# EAGLE board board (EAGLE 9.6.2)
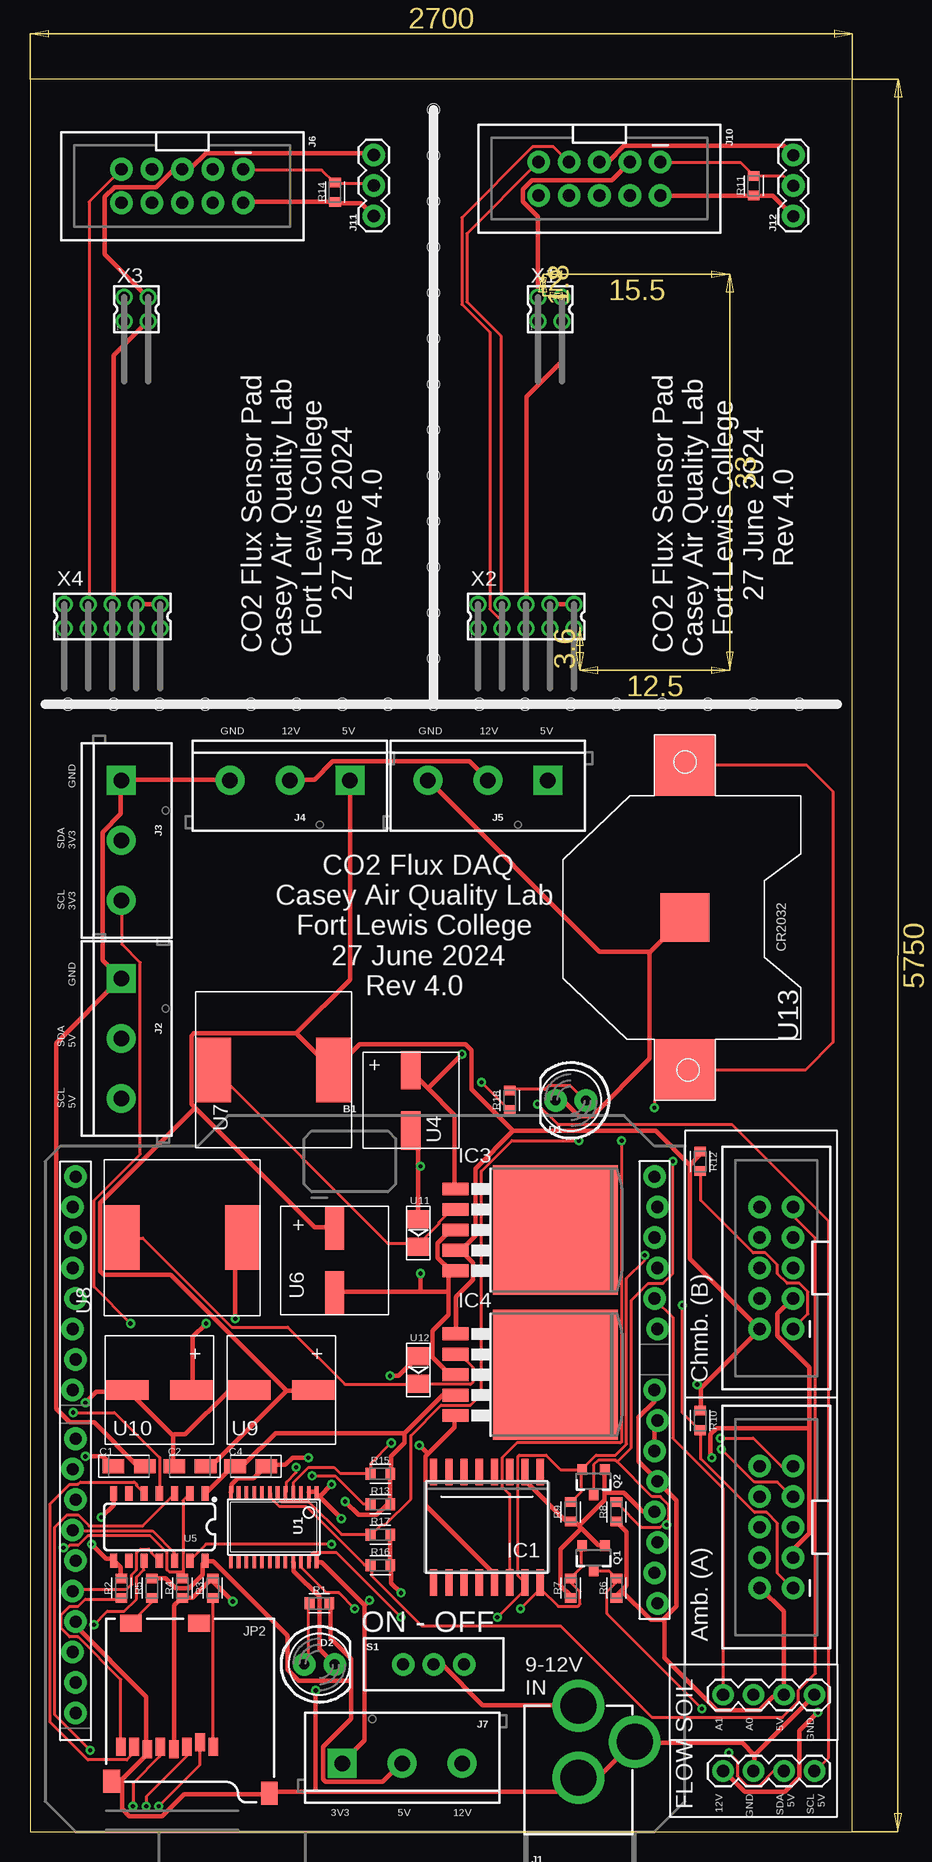
[diagram p0: board, top side]
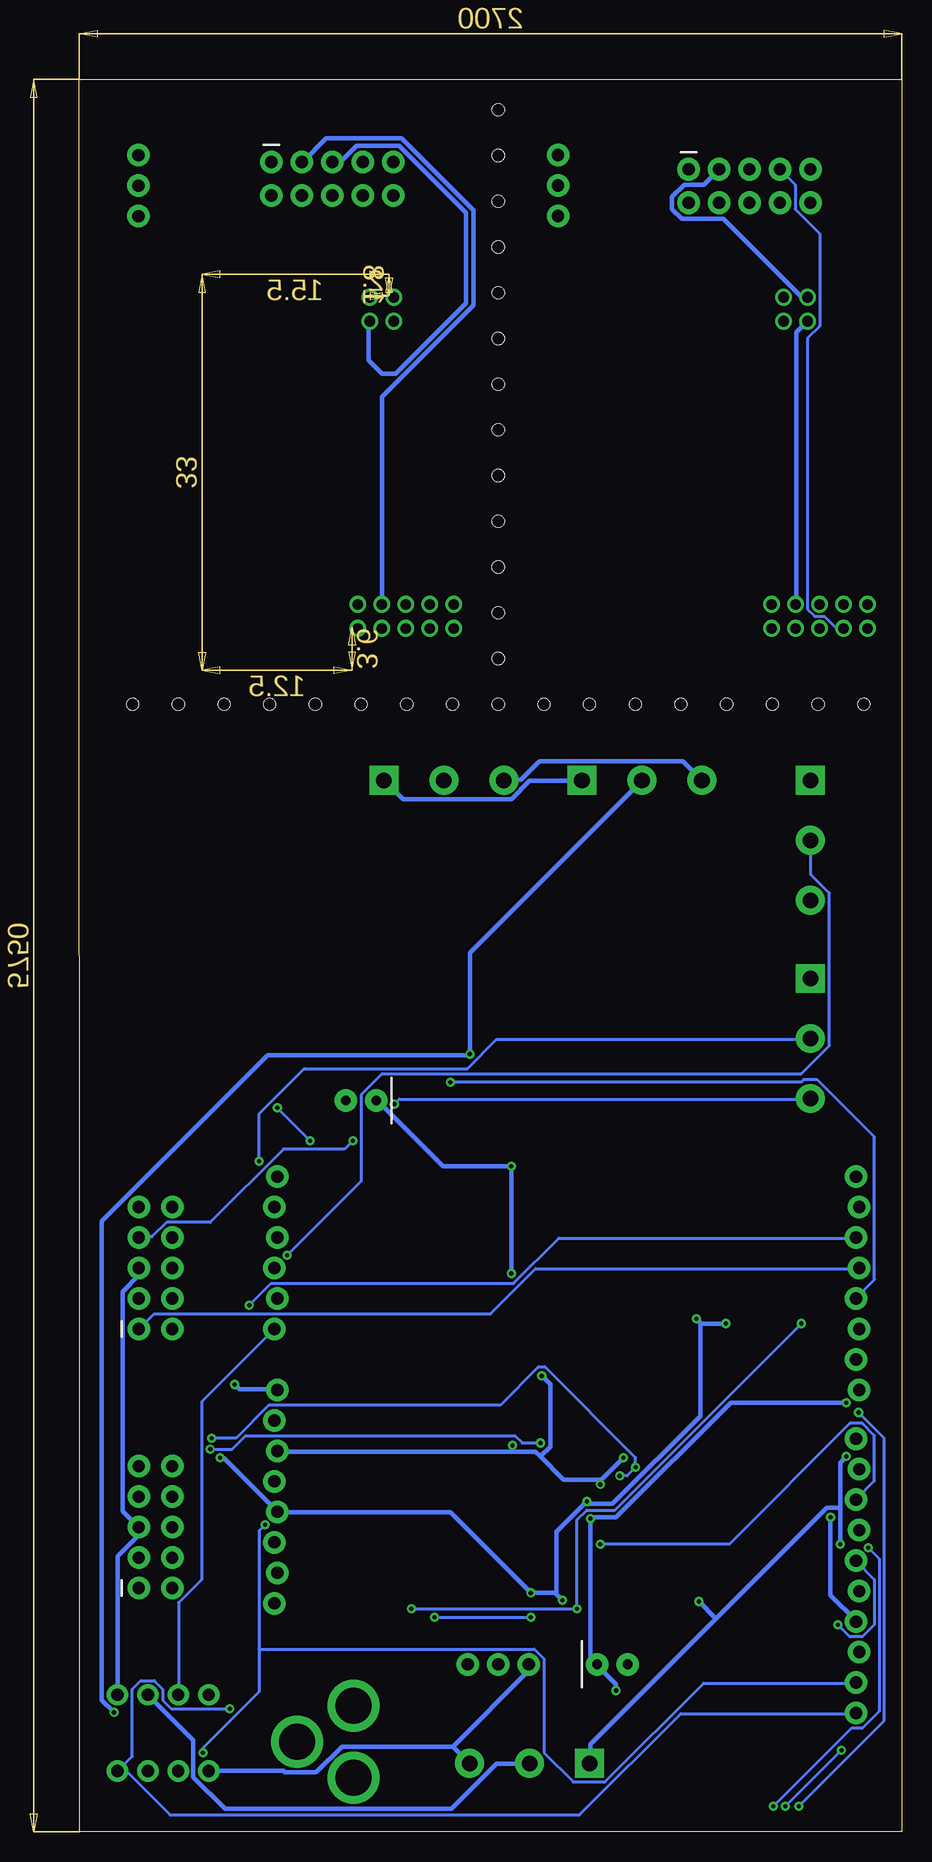
[diagram p1: board, bottom side, seen from below]

Size 68.58 x 146.05 mm. Coordinates in mm from the lower left corner, seen from the top.
Outline: 0,0 68.56,0 68.58,146.05 0,146.05 0,0
Copper layers (1*16): Top 0.035mm / dielectric 1.5mm / Bottom 0.035mm
Design rules "default": minimum track width 6mil, minimum drill 0.35mm, track to track 6mil, track to pad 6mil, pad to pad 6mil, via to via 6mil, smd to smd 6mil, copper to edge 40mil, drill to drill 6mil, minimum pad ring 10mil, minimum via ring 8mil, stop-mask expansion 4mil, vias tented up to drill 0mil, thermal gap 10mil
Net classes: 0 default: width 0.254 mm, clearance 0.152 mm; 1 power: width 0.381 mm, clearance 0.152 mm
Holes 1 mm at 3.17,93.98 6.98,93.98 10.79,93.98 14.61,93.98 18.41,93.98 22.22,93.98 26.04,93.98 29.84,93.98 33.66,93.98 37.47,93.98 41.28,93.98 45.09,93.98 48.9,93.98 52.71,93.98 56.52,93.98 60.33,93.98 64.14,93.98 33.66,97.79 33.66,101.6 33.66,105.41 33.66,109.22 33.66,113.03 33.66,116.84 33.66,120.65 33.66,124.46 33.66,128.27 33.66,132.08 33.66,135.89 33.66,139.7 33.66,143.51
tKeepout: area 45.7,81.3 to 64.8,86.4; area 57.1,66 to 64.8,81.3; area 45.7,66 to 57.2,71.1
vRestrict: area 5.1,43.2 to 20.3,55.9; area 20.3,41.9 to 30.5,53.3; area 5.1,31.8 to 26.7,41.9; area 30.5,47 to 34.3,53.3; area 30.5,35.6 to 34.3,41.9; area 27.9,55.9 to 35.6,66; area 12.7,57.2 to 27.9,69.8; area 33,31.8 to 50.8,57.2; area 31.7,19 to 44.5,31.8; area 43.2,17.8 to 50.8,31.8; area 5.1,29.2 to 21.6,31.8; area 6.3,21.6 to 15.2,29.2; area 6.3,17.8 to 16.5,21.6; area 6.4,2.5 to 20.3,17.8; area 19.1,1.3 to 21.6,5.1; area 5.1,2.5 to 7.6,6.3; area 26.7,20.3 to 31.7,31.8; area 38.1,58.4 to 41.9,63.5; area 54.6,53.3 to 57.1,58.4; area 54.6,31.8 to 57.1,36.8; area 21.6,17.8 to 26.7,20.3; area 24.1,134.6 to 26.7,139.7; area 59.1,134.6 to 61.6,139.7; area 15.9,21.6 to 24.8,29.2; area 5.1,58.4 to 10.2,90.2; area 14,85.1 to 45.7,90.2

## Footprints (pad centres in the part's own frame; a part is rotated, then mirrored left to right if it is on the bottom)
UNO_R3_SHIELD_NOLABELS_LOCK = drill 1.016 pad 1.88: 3.3V 24.13,-3.81; 5V 24.384,-1.27; A0 24.384,11.43; A1 24.13,13.97; A2 24.384,16.51; A3 24.13,19.05; A4 24.384,21.59; A5 24.13,24.13; AREF -24.384,-15.494; D2 -24.13,19.05; D3 -24.384,16.51; D4 -24.13,13.97; D5 -24.384,11.43; D6 -24.13,8.89; D7 -24.384,6.35; D8 -24.13,2.286; D9 -24.384,-0.254; D10 -24.13,-2.794; D11 -24.384,-5.334; D12 -24.13,-7.874; D13 -24.384,-10.414; GND@0 24.13,1.27; GND@1 24.384,3.81; GND@2 -24.13,-12.954; IOREF 24.13,-8.89; NC 24.384,-11.43; RES 24.384,-6.35; RX -24.13,24.13; SCL -24.13,-20.574; SDA -24.13,-18.034; TX -24.384,21.59; VIN 24.13,6.35
CAPMP3216X180N = smd 1.796 x 1.189: 1 -1.31,0; 2 1.31,0
1X04-BIG = drill 1.016 pad 1.778: 1 0,0; 2 2.54,0; 3 5.08,0; 4 7.62,0
LED_5MM = drill 0.813 pad 1.88: A -1.27,0; K 1.27,0
SO16W = smd 0.6 x 2.2: 1 -4.445,-4.6; 2 -3.175,-4.6; 3 -1.905,-4.6; 4 -0.635,-4.6; 5 0.635,-4.6; 6 1.905,-4.6; 7 3.175,-4.6; 8 4.445,-4.6; 9 4.445,4.6; 10 3.175,4.6; 11 1.905,4.6; 12 0.635,4.6; 13 -0.635,4.6; 14 -1.905,4.6; 15 -3.175,4.6; 16 -4.445,4.6
TO263-5 = smd 1.067 x 2.159: 1 -3.404,-5.791; 2 -1.702,-5.791; 3 0,-5.791; 4 1.702,-5.791; 5 3.404,-5.791 | smd 10.8 x 10.41: 6 0,2.54
POWER_JACK_PTH = drill 2.997 pad 4.318: GND 0,7.7; GNDBREAK 4.7,10.7; PWR 0,13.7
SCREWTERMINAL-5MM-3 = drill 1.3 pad 2.413 square: 1 0,0 | drill 1.3 pad 2.413: 2 5,0; 3 10,0
2X5-SHROUDED_LOCK = drill 1.016 pad 1.88: 1 -1.397,5.08; 2 1.397,5.08; 3 -1.397,2.54; 4 1.397,2.54; 5 -1.397,0; 6 1.397,0; 7 -1.397,-2.54; 8 1.397,-2.54; 9 -1.397,-5.08; 10 1.397,-5.08
1X03 = drill 1.016 pad 1.88: 1 0,0; 2 2.54,0; 3 5.08,0
MICRO-SD-SOCKET-PP = smd 1.8 x 1.4: CD1 -2.05,0.4; CD2 -7.75,0.4 | smd 0.8 x 1.5: CS -7.84,10.3; DI -6.74,10.7; DO -2.34,10.7; GND -3.44,10.9; RSV1 -8.94,10.7; RSV2 -1.24,10.7; SCLK -4.54,10.7; VCC -5.64,10.9 | smd 1.4 x 1.9: GND1 -13.6,14.55; GND3 -0.45,13.55
SOT23-3 = smd 0.8 x 0.9: 1 -0.95,-1; 2 0.95,-1; 3 0,1.1
RESC1608X60 = smd 0.799 x 0.974: 1 -0.815,0; 2 0.815,0
SWITCH_SPDT_PTH_11.6X4.0MM = drill 1.016 pad 1.88: 1 0,2.54; 2 0,0; 3 0,-2.54
TSSOP24 = smd 0.305 x 0.991: 1 -3.575,-2.918; 2 -2.925,-2.918; 3 -2.275,-2.918; 4 -1.625,-2.918; 5 -0.975,-2.918; 6 -0.325,-2.918; 7 0.325,-2.918; 8 0.975,-2.918; 9 1.625,-2.918; 10 2.275,-2.918; 11 2.925,-2.918; 12 3.575,-2.918; 13 3.575,2.918; 14 2.925,2.918; 15 2.275,2.918; 16 1.625,2.918; 17 0.975,2.918; 18 0.325,2.918; 19 -0.325,2.918; 20 -0.975,2.918; 21 -1.625,2.918; 22 -2.275,2.918; 23 -2.925,2.918; 24 -3.575,2.918
CAP_ALUM_22UF_20%_63V_SMD = smd 1.6 x 3.2: P$1 0,2.51; P$2 0,-2.51
SO14 = smd 0.6 x 1.2: 1 -3.81,-2.8; 2 -2.54,-2.8; 3 -1.27,-2.8; 4 0,-2.8; 5 1.27,-2.8; 6 2.54,-2.8; 7 3.81,-2.8; 8 3.81,2.8; 9 2.54,2.8; 10 1.27,2.8; 11 0,2.8; 12 -1.27,2.8; 13 -2.54,2.8; 14 -3.81,2.8
CAP_ALUM_33UF_20%_63V_SMD = smd 1.6 x 3.6: P$1 0,2.71; P$2 0,-2.71
FIXED_IND_47UH_3.8A_60_MOHM_SMD = smd 5.4 x 2.9: P$1 0,5; P$2 0,-5
CAP_ALUM_4.7UF_20%_100V_SMD = smd 1.6 x 3.6: P$1 0,2.71; P$2 0,-2.71
DIODE_SCHOTTKY_40V_3A_SMC = smd 1.5 x 1.8: P$1 -0.9,0; P$2 1.4,0
CR2032-SMD = smd 5.08 x 5.08: +$1 -12.7,0; +$2 12.7,0 | smd 4.064 x 4.064: - 0,0
332-04 = drill 0.9 pad 1.27: 1 -1,-1; 2 -1,1; 3 1,-1; 4 1,1
332-10 = drill 0.9 pad 1.27: 1 -4,-1; 2 -4,1; 3 -2,-1; 4 -2,1; 5 0,-1; 6 0,1; 7 2,-1; 8 2,1; 9 4,-1; 10 4,1

## Placement (x,y rotation side)
B1  ARDUINO_UNO_R3_SHIELD  [UNO_R3_SHIELD_NOLABELS_LOCK]  27.94,30.48 0 top
C1  0.1u  [CAPMP3216X180N]  8.26,30.48 0 top
C2  0.1u  [CAPMP3216X180N]  13.33,30.48 180 top
C4  0.1  [CAPMP3216X180N]  18.41,30.48 180 top
CN1  1X4-BIG  [1X04-BIG]  57.79,5.08 0 top
CN2  1X4-BIG  [1X04-BIG]  65.41,11.43 180 top
D1  LED 5mm  [LED_5MM]  45.09,60.96 180 top
D2  LED 5mm  [LED_5MM]  24.13,13.97 0 top
IC1  DS3231/SO  [SO16W]  38.1,25.4 180 top
IC3  LM2596S-5.0V  [TO263-5]  41.28,50.16 270 top
IC4  LM2596S-3.3V  [TO263-5]  41.28,38.1 270 top
J1  POWER_JACK  [POWER_JACK_PTH]  45.72,-3.17 0 top
J2  3-Pin Screw Terminal 5mm  [SCREWTERMINAL-5MM-3]  7.62,71.12 270 top
J3  3-Pin Screw Terminal 5mm  [SCREWTERMINAL-5MM-3]  7.62,87.63 270 top
J4  3-Pin Screw Terminal 5mm  [SCREWTERMINAL-5MM-3]  26.67,87.63 180 top
J5  3-Pin Screw Terminal 5mm  [SCREWTERMINAL-5MM-3]  43.18,87.63 180 top
J6  2x6 0.1" Shrouded Female Header  [2X5-SHROUDED_LOCK]  12.7,137.16 270 top
J7  3-Pin Screw Terminal 5mm  [SCREWTERMINAL-5MM-3]  26.04,5.71 0 top
J8  2x6 0.1" Shrouded Female Header  [2X5-SHROUDED_LOCK]  62.23,25.4 180 top
J9  2x6 0.1" Shrouded Female Header  [2X5-SHROUDED_LOCK]  62.23,46.99 180 top
J10  2x6 0.1" Shrouded Female Header  [2X5-SHROUDED_LOCK]  47.48,137.77 270 top
J11  [1X03]  28.66,134.66 90 top
J12  [1X03]  63.65,134.65 90 top
JP2  USD_CONNECTOR  [MICRO-SD-SOCKET-PP]  6.35,17.78 180 top
Q1  220mA/50V/3.5Ω  [SOT23-3]  46.99,22.86 180 top
Q2  220mA/50V/3.5Ω  [SOT23-3]  46.99,29.21 180 top
R1  220  [RESC1608X60]  24.13,19.05 0 top
R2  10k  [RESC1608X60]  7.62,20.32 270 top
R3  10k  [RESC1608X60]  15.24,20.32 270 top
R4  10k  [RESC1608X60]  10.16,20.32 270 top
R5  10k  [RESC1608X60]  12.7,20.32 90 top
R6  10k  [RESC1608X60]  48.9,20.32 90 top
R7  10k  [RESC1608X60]  45.09,20.32 90 top
R8  10k  [RESC1608X60]  48.9,26.67 90 top
R9  10k  [RESC1608X60]  45.09,26.67 90 top
R10  5k  [RESC1608X60]  55.88,34.29 270 top
R11  5k  [RESC1608X60]  60.34,137.19 90 top
R12  5k  [RESC1608X60]  55.88,55.88 270 top
R13  10k  [RESC1608X60]  29.21,27.3 180 top
R14  5k  [RESC1608X60]  25.43,136.65 90 top
R15  10k  [RESC1608X60]  29.21,29.84 180 top
R16  10k  [RESC1608X60]  29.21,22.23 180 top
R17  10k  [RESC1608X60]  29.21,24.77 180 top
R18  220  [RESC1608X60]  40.01,60.96 270 top
S1  Switch  [SWITCH_SPDT_PTH_11.6X4.0MM]  33.66,13.97 270 top
U1  TCA9548APWR  [TSSOP24]  20.32,25.4 180 top
U4  22uF  [CAP_ALUM_22UF_20%_63V_SMD]  31.75,60.96 180 top
U5  TXB0104  [SO14]  10.79,25.4 180 top
U6  33uF  [CAP_ALUM_33UF_20%_63V_SMD]  25.4,47.62 180 top
U7  47uH  [FIXED_IND_47UH_3.8A_60_MOHM_SMD]  20.32,63.5 90 top
U8  33uH  [FIXED_IND_47UH_3.8A_60_MOHM_SMD]  12.7,49.53 90 top
U9  4.7uF  [CAP_ALUM_4.7UF_20%_100V_SMD]  20.95,36.83 90 top
U10  4.7uF  [CAP_ALUM_4.7UF_20%_100V_SMD]  10.79,36.83 90 top
U11  Schottky  [DIODE_SCHOTTKY_40V_3A_SMC]  32.38,50.16 270 top
U12  Schottky  [DIODE_SCHOTTKY_40V_3A_SMC]  32.38,38.73 270 top
U13  PRT-11892  [CR2032-SMD]  54.61,76.2 270 top
X1  332-04  [332-04]  43.36,126.89 0 top
X2  332-10  [332-10]  41.36,101.29 0 top
X3  332-04  [332-04]  8.86,126.89 0 top
X4  332-10  [332-10]  6.86,101.29 0 top

## Library data of the parts
B1 = SparkFun-Boards
C1 C2 C4 = Capacitor; CATEGORY: Capacitor
CN1 CN2 IC1 U13 = adafruit
D1 D2 = SparkFun-LED; PARTNO: FLC INVENTORY
IC3 IC4 = national-semiconductor; MF: NATIONAL SEMICONDUCTOR; MPN: LM2596S-ADJ/NOPB; OC_FARNELL: 9494367; OC_NEWARK: 41K3842; PARTNO: FLC INVENTORY
J1 = SparkFun-Connectors; PARTNO: FLC INVENTORY; PROD_ID: CONN-08197
J2-J5 J7 = SparkFun-Connectors; PARTNO: 2057-EB21A-03-C-ND; PROD_ID: CONN-10134; SF_SKU: PRT-08433
J6 J8-J10 = SparkFun-Connectors; PARTNO: PRT-08506 and PRT-10650; PROD_ID: CONN-08671; SF_ID: PRT-08506
J11 J12 = SparkFun-Connectors
JP2 = SparkFun-Connectors; PROD_ID: CONN-07820
Q1 Q2 = SparkFun-DiscreteSemi; PROD_ID: TRANS-00830
R1-R18 = Resistor; CATEGORY: Resistor; SUB-CATEGORY: Fixed
S1 = SparkFun-Switches; PARTNO: EG2355-ND; PROD_ID: SWCH-08261; SF_SKU: COM-00102
U1 = microbuilder
U4 U6-U12 = vreg_5v_33v; PARTNO: FLC INVENTORY
U5 = SparkFun-DigitalIC; PROD_ID: IC-11329
X1-X4 = con-garry

## Nets
3V3 [power]: B1.3.3V C1.1 C4.2 IC1.2 IC4.4 J7.1 J8.3 J9.3 JP2.VCC Q1.1 Q2.1 R2.1 R3.1 R5.1 R7.1 R9.1 R13.1 R15.1 R16.1 R17.1 U1.24 U5.1 U5.8 U8.P$2 U10.P$2
5V [power]: B1.5V B1.VIN C2.1 CN2.2 IC3.4 IC4.1 J4.1 J5.1 J7.2 J8.2 J9.2 R1.2 R4.1 R6.1 R8.1 R10.1 R12.1 U5.14 U6.P$2 U7.P$2 U9.P$2
12V [power]: CN1.1 IC3.1 J4.2 J5.2 J7.3 S1.3 U4.P$2
!CS_3V3: JP2.CS R5.2 U5.2
A0: B1.A0 CN2.3
A1: B1.A1 CN2.4
AUX0_3V3 [power]: J10.3 X1.1 X1.2 X2.8 X2.9 X2.10
AUX0_5V [power]: J10.2 J12.1 R11.1
AUX0_D3: J10.1 J12.2 R11.2
AUX0_GND [power]: J10.5 J12.3 X1.3 X1.4 X2.6
AUX0_SCL1_3V3: J10.9 X2.4
AUX0_SDA1_3V3: J10.7 X2.3
AUX1_3V3 [power]: J6.3 X3.1 X3.2 X4.8 X4.9 X4.10
AUX1_5V [power]: J6.2 J11.1 R14.1
AUX1_D2: J6.1 J11.2 R14.2
AUX1_GND [power]: J6.5 J11.3 X3.3 X3.4 X4.6
AUX1_SCL0_3V3: J6.9 X4.4
AUX1_SDA0_3V3: J6.7 X4.3
CDSDSD: JP2.CD1 R4.2
D2: B1.D2 J8.1 R10.2
D3: B1.D3 J9.1 R12.2
D4: B1.D4 R18.2
D10: B1.D10 U5.13
D11: B1.D11 U5.12
D12: B1.D12 U5.10
D13: B1.D13 U5.11
DI_3V3: JP2.DI U5.3
DO_3V3: JP2.DO U5.5
GND [power]: B1.GND@0 B1.GND@1 B1.GND@2 C1.2 C2.2 C4.1 CN1.2 CN2.1 D1.K D2.K IC1.13 IC3.3 IC3.5 IC4.3 IC4.5 J1.GND J1.GNDBREAK J2.1 J3.1 J4.3 J5.3 J8.5 J9.5 JP2.GND JP2.GND1 JP2.GND3 U1.1 U1.2 U1.12 U1.21 U4.P$1 U5.7 U6.P$1 U9.P$1 U10.P$1 U11.P$1 U12.P$1 U13.-
N$1: D1.A R18.1
N$2: JP2.RSV1 R3.2
N$3: JP2.RSV2 R2.2
N$5: D2.A R1.1
N$7: IC3.2 U7.P$1 U11.P$2
N$10: IC4.2 U8.P$1 U12.P$2
PWR_IN [power]: J1.PWR S1.2
SCK_3V3: JP2.SCLK U5.4
SCL0_3V3: J8.9 R13.2 U1.5
SCL1_3V3: J9.9 R16.2 U1.7
SCL_3V3: IC1.16 J3.3 Q1.2 R7.2 U1.22
SCL_5V: B1.SCL CN1.4 J2.3 Q1.3 R6.2
SDA0_3V3: J8.7 R15.2 U1.4
SDA1_3V3: J9.7 R17.2 U1.6
SDA_3V3: IC1.15 J3.2 Q2.2 R9.2 U1.23
SDA_5V: B1.SDA CN1.3 J2.2 Q2.3 R8.2
VBAT: IC1.14 U13.+$1 U13.+$2

## Tracks (layer width: path | path; a pad name or v marks a point on that pad's centre or on a via)
3V3  (via drill 0.35)
  Top 0.381: U5.1 14.68,28.25 16.92,30.48 C4.2 17.22,30.58 17.83,30.58 20.47,33.22 31.24,33.22 | 31.24,33.22 31.24,32.41 30.12,31.29 30.12,29.97 R15.1 30.02,29.77 30.02,27.33 R13.1 29.92,27.23 29.72,27.23 28.91,26.42 27.38,26.42 v26.26,27.53 | 31.24,33.22 34.39,36.37 35.41,36.37 IC4.4 | 64.97,33.63 64.97,38.71 62.33,41.35 62.33,43.18 63.55,44.4 J9.3 | 64.97,33.63 64.97,24.89 63.65,23.57 63.65,22.86 J8.3 | v14.68,42.37 13.56,41.25 13.56,36.88 U10.P$2 | v17.12,42.77 17.12,48.97 17.63,49.48 U8.P$2 | 45.77,25.5 45.47,25.81 45.16,25.81 R9.1 44.96,26.01 44.55,26.01 41.3,29.26 41.3,29.97 IC1.2 | 45.77,25.5 45.97,25.3 | 45.97,25.3 47.4,23.88 47.9,23.88 Q1.1 | 47.9,28.25 47.9,27.64 45.77,25.5 | 47.9,28.25 47.9,30.18 Q2.1 | 45.97,25.3 44.25,23.57 44.25,20.52 45.06,19.71 45.06,19.51 R7.1 | 47.9,28.25 49.53,28.25 51.05,26.72 52.07,26.72 B1.3.3V | JP2.VCC 12.04,6.91 12.04,18.9 12.55,19.41 R5.1 12.75,19.51 13.56,19.51 15.19,21.13 R3.1 15.19,20.93 v16.92,19.2 | R2.1 7.57,21.23 7.57,22.05 7.06,22.55 U5.8 6.86,22.76 6.35,22.76 v5.13,23.98 | v4.62,31.29 6.04,31.29 6.86,30.48 C1.1 | R17.1 30.02,24.69 30.02,22.25 R16.1 30.12,22.05 30.12,20.73 v30.94,19.91 | 27.89,18.9 24.33,22.45 23.93,22.45 U1.24 | 27.89,18.9 27.89,7.62 26.06,5.79 J7.1 | 27.89,18.9 v28.3,19.3 | 64.97,33.63 57.25,33.63 56.74,33.12 56.74,31.29 v56.85,31.19
  Bottom 0.381: 16.71,42.37 v14.68,42.37 | v17.12,42.77 16.71,42.37 | 5.13,27.03 5.13,30.79 v4.62,31.29 | 5.13,27.03 v5.13,23.98 | 28.91,19.91 v30.94,19.91 37.64,26.62 52.07,26.62 B1.3.3V 52.17,26.82 56.54,31.19 v56.85,31.19 | v28.3,19.3 28.91,19.91 | 5.13,27.03 6.25,27.03 15.49,17.78 | 15.49,17.78 25.96,7.32 25.96,5.79 J7.1 | 15.49,17.78 v16.92,19.2 | 26.26,27.33 26.47,27.33 28.8,24.99 28.8,20.02 28.91,19.91 | 26.26,27.33 24.13,27.33 16.82,34.65 16.82,42.27 16.71,42.37 | v26.26,27.53 26.26,27.33
5V  (via drill 0.35)
  Top 0.381: R4.1 10.21,21.13 11.33,21.13 12.14,20.32 13.26,20.32 14.38,21.44 14.38,22.35 14.58,22.55 U5.14 14.78,22.55 15.29,22.55 21.49,16.36 21.49,13.51 22.4,12.6 26.77,12.6 | 26.77,12.6 26.77,9.45 24.43,7.11 24.43,4.37 24.64,4.17 29.41,4.17 30.94,5.69 J7.2 | 26.77,12.6 26.77,14.43 25.04,16.15 25.04,19 R1.2 | J8.2 60.91,20.32 62.84,18.39 62.84,11.48 CN2.2 62.74,11.28 61.93,11.28 60.81,10.16 57.25,10.16 52.88,14.53 52.88,17.58 52.78,17.68 | 49.33,20.12 49.73,20.52 49.73,24.99 48.92,25.81 R8.1 | 49.33,20.12 48.92,19.71 48.92,19.51 R6.1 | 49.33,20.12 51.77,17.68 52.78,17.68 | 52.78,17.68 53.9,18.8 53.9,27.64 B1.5V 52.27,29.36 50.75,30.89 50.75,34.54 52.07,35.87 B1.VIN | IC4.1 35.51,41.55 35.51,44.6 36.93,46.02 36.93,47.45 35.92,48.46 IC3.4 36.02,48.56 37.14,49.68 37.14,55.27 40.28,58.42 | 55.93,36.98 55.93,35.15 R10.1 | 55.93,36.98 60.81,41.86 J9.2 60.71,42.06 55.02,47.75 55.02,55.58 | 55.02,55.58 55.83,56.39 55.83,56.69 R12.1 | 40.28,58.42 52.17,58.42 55.02,55.58 | C2.1 15.09,30.48 21.39,36.78 | 21.39,36.78 23.62,36.78 U9.P$2 | 13.77,60.35 13.46,60.66 13.46,66.34 13.66,66.55 22.2,66.55 | 13.77,60.35 23.72,50.39 25.35,50.39 U6.P$2 | 22.2,66.55 25.25,63.5 U7.P$2 25.45,63.6 27.48,65.63 36.32,65.63 36.83,65.13 36.83,61.87 40.28,58.42 | 21.39,36.78 11.73,46.43 6.15,46.43 5.84,46.74 5.84,52.43 13.77,60.35 | J4.1 26.67,71.02 22.2,66.55 | 55.93,36.98 v55.63,37.29
  Bottom 0.381: J7.2 31.04,5.69 33.78,5.69 37.54,1.93 56.44,1.93 59.08,4.57 59.08,7.62 62.84,11.38 CN2.2 | J5.1 41.61,86.06 32.56,86.06 31.04,87.58 26.67,87.58 J4.1 | v55.63,37.29 55.22,36.88 52.07,36.88 B1.VIN
12V  (via drill 0.35)
  Top 0.381: 33.17,61.98 31.75,63.4 U4.P$2 | 33.17,61.98 35.41,59.74 35.41,53.65 IC3.1 | J4.2 21.69,87.68 23.72,87.68 25.25,89.2 36.63,89.2 38.15,87.68 J5.2 | v36.02,64.82 33.17,61.98 | v65.68,9.96 64.16,8.43 64.16,4.57 62.94,3.35 59.59,3.35 57.86,5.08 CN1.1
  Bottom 0.381: CN1.1 51.56,5.08 51.46,4.98 48.82,4.98 46.69,7.11 37.44,7.11 | 37.44,7.11 36.12,5.79 J7.3 | 37.44,7.11 31.14,13.41 31.14,13.92 S1.3 | J4.2 21.69,87.58 36.02,73.25 v36.02,64.82 36.12,64.72 52.88,64.72 66.7,50.9 66.7,10.97 v65.68,9.96
!CS_3V3  (via drill 0.35)
  Top 0.254: 12.75,21.64 12.75,27.64 13.26,28.14 U5.2 | 12.75,21.64 12.75,21.23 R5.2 | v10.72,2.13 14.17,5.59 14.17,7.42 JP2.CS | v2.79,23.67 3.1,23.67 3.3,23.88 4.01,23.88 4.83,24.69 10.01,24.69 11.43,23.27 11.43,21.84 11.63,21.64 12.75,21.64
  Bottom 0.254: v10.72,2.13 4.22,8.64 3.3,8.64 1.88,10.06 1.88,22.76 v2.79,23.67
A0
  Bottom 0.254: B1.A0 58.37,35.87 58.37,21.03 60.3,19.1 60.3,11.48 CN2.3
A1
  Top 0.254: CN2.4 57.76,11.48 57.76,28.65 53.59,32.82 53.59,42.88 52.07,44.4 B1.A1
AUX0_3V3
  Top 0.381: X1.1 X1.2 42.36,134.6 41.12,135.84 41.12,136.9 41.87,137.66 48.51,137.66 J10.3 | X2.9 X2.10 X2.8
  Bottom 0.381: X2.8 43.33,102.31 43.33,119.58 35.71,127.2 35.71,135.13 41.71,141.12 48.01,141.12 49.94,139.19 J10.3
AUX0_5V
  Top 0.381: J12.1 63.55,134.72 61.93,136.35 60.4,136.35 R11.1 60.2,136.35 52.58,136.35 J10.2
AUX0_D3
  Top 0.254: J12.2 63.55,137.26 62.84,137.97 60.4,137.97 R11.2 60.3,138.07 59.28,139.09 52.58,139.09 J10.1
AUX0_GND
  Top 0.381: J10.5 47.5,139.19 48.21,139.19 49.53,140.51 62.84,140.51 63.55,139.8 J12.3 | 44.45,125.88 44.45,122.63 41.4,119.58 41.4,102.31 X2.6 | 44.45,125.88 X1.3 | X1.4 44.45,127.8 44.45,125.88
  Bottom 0.381: J10.5 47.4,139.19 46.79,139.19 45.47,140.51 41.91,140.51 36.32,134.93 36.32,127.41 42.22,121.51 43.33,121.51 44.45,122.63 44.45,125.88 X1.3
AUX0_SCL1_3V3
  Top 0.254: X2.4 39.27,102.31 39.27,124.66 36.42,127.51 36.42,133.2 42.32,139.09 J10.9
AUX0_SDA1_3V3
  Top 0.254: X2.3 39.27,100.38 39.27,100.99 38.35,101.91 38.35,124.97 36.02,127.31 36.02,134.52 41.91,140.41 43.64,140.41 44.86,139.19 J10.7
AUX1_3V3
  Top 0.381: X4.8 8.89,102.31 10.82,102.31 X4.10 10.82,102.11 10.82,100.38 X4.9 | X3.1 7.87,125.98 7.87,127.81 X3.2
  Bottom 0.381: X3.2 7.87,127.91 8.38,127.91 14.88,134.42 18.34,134.42 19.15,135.23 19.15,136.25 18.14,137.26 16.51,137.26 15.29,138.48 J6.3 | X4.8 8.79,102.31 8.79,124.97 7.87,125.88 X3.1
AUX1_5V
  Top 0.381: J11.1 28.6,134.72 27.58,135.74 25.45,135.74 R14.1 25.25,135.84 17.83,135.84 J6.2
AUX1_D2
  Top 0.254: J11.2 28.6,137.26 28.5,137.36 25.45,137.36 R14.2 25.35,137.47 24.33,138.48 17.83,138.48 J6.1
AUX1_GND
  Top 0.381: J11.3 28.6,139.8 28.5,139.9 14.68,139.9 13.36,138.58 12.75,138.58 J6.5 12.55,138.48 11.94,138.48 10.52,137.06 7.06,137.06 6.25,136.25 6.25,131.47 9.7,128.02 X3.4 9.91,127.81 9.91,126.09 X3.3 9.8,125.88 6.96,123.04 6.96,102.31 X4.6
AUX1_SCL0_3V3
  Top 0.254: X4.4 4.93,102.31 4.93,135.84 7.57,138.48 J6.9
AUX1_SDA0_3V3
  Bottom 0.254: X4.3 4.93,100.38 5.54,100.38 6.45,101.3 7.26,101.3 7.87,101.91 7.87,124.46 6.86,125.48 6.86,133.2 8.89,135.23 8.89,137.26 10.11,138.48 J6.7
CDSDSD
  Top 0.254: R4.2 10.11,19.41 10.11,19.1 8.48,17.48 JP2.CD1
D2  (via drill 0.35)
  Top 0.254: J8.1 63.55,20.32 62.33,21.54 62.33,25.7 61.42,26.62 60.4,26.62 55.93,31.09 55.93,33.43 R10.2 55.83,33.53 54.41,34.95 v54.41,43.89
  Bottom 0.254: v54.41,43.89 52.58,45.72 32.36,45.72 28.6,49.48 3.81,49.48 B1.D2
D3
  Top 0.254: R12.2 55.93,54.97 55.93,52.63 60.3,48.26 61.32,48.26 62.33,47.24 62.33,46.53 63.14,45.72 64.16,45.72 64.87,45.01 64.87,43.18 63.65,41.96 J9.1
  Bottom 0.254: B1.D3 3.61,46.94 30.53,46.94 34.29,43.18 62.33,43.18 63.55,41.96 J9.1
D4  (via drill 0.35)
  Top 0.254: v37.64,62.48 39.98,60.15 R18.2
  Bottom 0.254: v37.64,62.48 8.38,62.48 8.18,62.69 7.06,62.69 2.29,57.91 2.29,46.02 3.81,44.5 B1.D4
D10  (via drill 0.35)
  Top 0.254: v25.15,23.98 14.68,23.98 13.36,22.66 U5.13
  Bottom 0.254: v25.15,23.98 14.38,23.98 4.32,34.04 3.3,34.04 2.29,33.02 2.29,29.26 3.81,27.74 B1.D10
D11
  Top 0.254: U5.12 12.04,22.66 12.04,23.27 10.21,25.09 3.61,25.09 B1.D11
D12  (via drill 0.35)
  Top 0.254: v5.33,17.27 6.45,18.39 7.87,18.39 8.89,19.41 8.89,21.23 9.5,21.84 9.5,22.55 U5.10
  Bottom 0.254: v5.33,17.27 4.32,16.26 3.3,16.26 2.29,17.27 2.29,21.03 3.81,22.55 B1.D12
D13
  Top 0.254: B1.D13 3.71,20.22 8.08,20.22 8.48,20.62 8.48,21.44 8.89,21.84 8.89,23.27 9.2,23.57 9.91,23.57 10.11,23.37 10.11,23.27 10.72,22.66 U5.11
DI_3V3  (via drill 0.35)
  Top 0.254: v5.03,6.81 2.08,9.75 2.08,25.4 3.1,26.42 4.01,26.42 4.93,25.5 9.4,25.5 12.04,28.14 U5.3 | v9.7,2.13 9.7,2.95 13.06,6.3 13.06,7.01 JP2.DI
  Bottom 0.254: v9.7,2.13 v5.03,6.81
DO_3V3
  Top 0.254: U5.5 9.5,28.25 8.89,28.85 8.89,28.96 8.69,29.16 4.22,29.16 4.01,28.96 3.3,28.96 1.68,27.33 1.68,9.14 4.83,5.99 8.08,5.99 8.69,6.6 8.69,7.01 JP2.DO
GND  (via drill 0.35)
  Top 0.381: v5.94,26.21 6.96,27.23 6.96,28.14 U5.7 | 7.57,4.27 9.7,6.4 9.7,6.81 JP2.GND 9.7,7.01 9.7,11.28 3.81,17.17 B1.GND@2 | 7.57,4.27 6.86,4.27 JP2.GND3 | 7.57,4.27 7.67,4.17 7.67,1.93 8.28,1.32 11.02,1.32 12.85,3.15 19.86,3.15 JP2.GND1 20.07,3.35 23.82,3.35 | 60.4,6.4 60.4,5.08 CN1.2 | 60.4,6.4 65.38,11.38 CN2.1 | 60.4,6.4 59.39,7.42 50.55,7.42 J1.GNDBREAK 50.34,7.52 47.4,4.57 45.77,4.57 J1.GND 45.57,4.47 44.45,3.35 23.82,3.35 | 11.94,33.02 11.94,30.48 C2.2 | 11.94,33.02 8.18,36.78 U10.P$1 7.98,36.68 5.54,36.68 v4.62,35.76 | U9.P$1 18.24,36.78 16.61,36.78 12.95,33.12 12.04,33.12 11.94,33.02 | 33.17,31.5 32.97,31.29 32.97,27.23 38.66,21.54 38.66,20.83 IC1.13 | 33.17,31.5 35.41,33.73 35.41,34.65 IC4.5 | B1.GND@0 52.07,34.04 B1.GND@1 | U1.12 16.82,28.35 16.82,28.96 17.32,29.46 18.64,29.46 19.66,30.48 C4.1 19.86,30.58 21.29,30.58 21.89,31.19 v23.22,31.19 | U1.2 23.32,28.35 23.82,28.35 U1.1 23.93,28.14 24.13,27.94 | D2.K 24.13,15.24 24.13,19.61 22,21.74 22,22.45 U1.21 | v25.96,26.11 24.13,27.94 | 24.13,27.94 v25.15,28.96 | v32.46,32.21 33.17,31.5 | IC3.3 35.41,50.09 35,50.09 33.99,49.07 33.99,47.85 35,46.84 35.41,46.84 IC3.5 34.9,46.74 34.9,45.01 | 33.48,39.62 32.46,39.62 U12.P$1 32.26,39.52 30.73,38 v30.02,38 | 33.48,39.62 35,38.1 IC4.3 | 34.9,45.01 34.9,43.08 33.58,41.76 33.58,39.73 33.48,39.62 | 34.9,45.01 32.56,45.01 | 32.56,45.01 25.45,45.01 U6.P$1 | 32.36,55.47 32.36,57.81 31.75,58.42 U4.P$1 | 32.36,55.47 32.36,51.1 U11.P$1 | D1.K 44.45,60.96 45.77,59.64 46.89,59.64 51.66,64.41 51.66,73.25 | U13.- 51.66,73.25 | v32.56,55.47 32.36,55.47 | v32.56,46.53 32.56,45.01 | J4.3 16.61,87.68 7.67,87.68 J3.1 7.57,87.48 7.57,84.84 6.04,83.31 6.04,72.64 7.47,71.22 J2.1 7.57,71.12 2.18,65.73 2.18,35.26 3.3,34.14 5.33,34.14 8.99,30.48 C1.2
  Top 0.381: 51.66,73.25 51.56,73.36 47.5,73.36 33.27,87.58 J5.3 | v23.82,11.79 23.82,3.35
  Bottom 0.381: v5.94,26.21 5.94,19.71 3.81,17.58 B1.GND@2 | CN2.1 65.38,11.48 65.38,22.96 63.65,24.69 63.65,25.4 J8.5 63.75,25.5 64.97,26.72 64.97,45.01 63.65,46.33 63.65,46.94 J9.5 | 25.15,29.26 v23.22,31.19 | v25.15,28.96 25.15,29.26 | 32.46,31.7 30.53,31.7 30.12,31.29 | 32.46,31.7 52.07,31.7 B1.GND@0 | 30.12,31.29 28.19,29.36 25.25,29.36 25.15,29.26 | 32.46,31.7 v32.46,32.21 | v4.62,35.76 14.28,35.76 23.82,26.21 25.86,26.21 v25.96,26.11 25.96,14.53 D2.K 25.35,13.82 23.82,12.29 v23.82,11.79 | D1.K 43.74,60.96 38.25,55.47 v32.56,55.47 v32.56,46.53 | J5.3 33.17,87.68 31.75,87.68 30.23,89.2 18.24,89.2 16.71,87.68 J4.3 | 30.12,31.29 29.31,32.11 29.31,37.29 v30.02,38
N$1
  Top 0.254: R18.1 40.08,61.87 42.93,61.87 43.23,62.18 45.06,62.18 46.28,60.96 D1.A
N$2
  Top 0.254: R3.2 15.29,19.41 15.29,7.11 JP2.RSV1
N$3
  Top 0.254: R2.2 7.57,19.41 4.62,19.41 4.01,18.8 3.3,18.8 2.59,18.09 2.59,16.97 3.3,16.26 4.01,16.26 7.57,12.7 7.57,7.11 JP2.RSV2
N$5
  Top 0.254: D2.A 23.22,14.33 23.22,19 R1.1
N$7
  Top 0.254: IC3.2 35.41,51.82 35.1,51.82 34.09,50.8 34.09,50.7 32.46,49.07 32.46,48.77 U11.P$2 32.36,49.07 29.82,49.07 15.39,63.5 U7.P$1
N$10
  Top 0.254: IC4.2 35.51,39.73 35.92,39.73 36.93,38.71 36.93,37.49 36.73,37.29 32.46,37.29 U12.P$2 32.36,37.29 26.26,37.29 21.49,42.06 16.82,42.06 9.4,49.48 7.77,49.48 U8.P$1
PWR_IN
  Top 0.381: S1.2 33.68,13.92 34.39,13.92 37.74,10.57 45.67,10.57 J1.PWR
SCK_3V3  (via drill 0.35)
  Top 0.254: v3.61,34.95 7.06,34.95 10.82,31.19 10.82,28.25 U5.4 | v8.59,2.13 8.59,4.06 10.82,6.3 10.82,7.01 JP2.SCLK
  Bottom 0.254: v3.61,34.95 1.47,32.82 1.47,9.25 v8.59,2.13
SCL0_3V3  (via drill 0.35)
  Top 0.254: v23.52,29.67 25.45,29.67 27.79,27.33 28.3,27.33 R13.2 | v22.2,30.38 22.2,29.97 21.39,29.16 21.39,28.35 U1.5 | J8.9 62.64,30.48 60.3,32.82 v57.56,32.82
  Bottom 0.254: v23.52,29.67 22.91,29.67 v22.2,30.38 22.2,31.19 29.72,38.71 30.33,38.71 33.48,35.56 52.78,35.56 55.52,32.82 v57.56,32.82
SCL1_3V3
  Top 0.254: U1.7 20.07,28.25 20.07,27.84 20.78,27.13 23.01,27.13 27.89,22.25 28.3,22.25 R16.2 28.5,22.15 28.5,21.34 32.66,17.17 44.25,17.17 51.87,9.55 62.74,9.55 64.06,10.87 64.06,11.79 65.48,13.21 65.48,49.48 63.65,51.31 63.65,52.02 J9.9
SCL_3V3  (via drill 0.35)
  Top 0.254: Q1.2 45.97,23.77 45.97,22.05 45.16,21.23 R7.2 45.16,21.03 45.16,20.73 45.87,20.02 45.87,19 45.67,18.8 44.04,18.8 42.62,20.22 IC1.16 42.52,20.73 42.52,20.22 v40.89,18.59 | v27.08,18.59 25.76,19.91 24.74,19.91 22.61,22.05 22.61,22.45 U1.22 | v8.38,42.37 5.33,45.41 5.33,52.63 9.2,56.49 9.2,72.44 7.67,73.97 7.67,77.62 J3.3
  Bottom 0.254: v40.89,18.59 v27.08,18.59 27.08,26.01 26.26,26.82 23.93,26.82 v8.38,42.37
SCL_5V  (via drill 0.35)
  Top 0.254: Q1.3 46.99,21.74 48.31,21.74 48.82,21.23 R6.2 48.82,21.03 48.82,20.73 48.11,20.02 48.11,18.19 v56.03,10.26 | v42.32,60.66 44.04,58.93 58.57,58.93 66.6,50.9 66.6,6.2 65.48,5.08 CN1.4
  Bottom 0.254: v56.03,10.26 60.91,10.26 61.62,10.97 61.62,11.89 62.33,12.6 63.45,12.6 64.16,11.89 64.16,6.3 65.38,5.08 CN1.4 64.97,5.38 61.01,1.42 26.87,1.42 18.44,9.86 3.81,9.86 B1.SCL | v42.32,60.66 41.91,61.06 7.67,61.06 J2.3
SDA0_3V3  (via drill 0.35)
  Top 0.254: U1.4 22,28.35 22,29.16 23.22,30.38 25.35,30.38 25.86,29.87 28.3,29.87 R15.2 28.4,29.97 28.4,30.68 v30.12,32.41 | v57.66,31.9 60.4,29.16 62.33,29.16 63.55,27.94 J8.7
  Bottom 0.254: v30.12,32.41 31.65,32.41 32.26,33.02 54.71,33.02 55.83,31.9 v57.66,31.9
SDA1_3V3  (via drill 0.35)
  Top 0.254: U1.6 20.68,28.25 20.68,27.84 20.98,27.53 23.22,27.53 25.96,24.79 28.3,24.79 R17.2 28.5,24.79 29.31,25.6 29.62,25.6 31.75,27.74 31.75,33.02 34.29,35.56 36.73,35.56 37.64,36.47 37.64,55.07 40.18,57.61 v45.77,57.61
  Bottom 0.254: v45.77,57.61 46.48,56.9 51.56,56.9 57.66,50.8 61.32,50.8 62.54,49.58 63.55,49.58 J9.7
SDA_3V3  (via drill 0.35)
  Top 0.254: Q2.2 45.97,30.18 45.97,28.35 45.16,27.53 R9.2 | v30.94,17.88 25.55,23.27 23.62,23.27 23.32,22.96 23.32,22.55 U1.23 | v38.96,17.88 41.2,20.12 41.2,20.73 IC1.15 41.2,20.83 40.69,21.34 40.69,31.29 40.79,31.39 43.03,31.39 44.25,30.18 45.87,30.18 Q2.2 | v51.26,48.06 51.26,47.65 49.73,46.13 49.73,32.31 48.82,31.39 47.19,31.39 46.08,30.28 Q2.2
  Bottom 0.254: v38.96,17.88 v30.94,17.88 | v51.26,48.06 45.06,54.25 45.06,61.47 43.33,63.2 8.38,63.2 6.04,65.53 6.04,78.23 7.57,79.76 7.57,82.6 J3.2
SDA_5V  (via drill 0.35)
  Top 0.254: Q2.3 46.99,30.58 47.4,30.99 48.82,30.99 48.97,30.84 | 48.97,30.84 51.87,27.94 52.58,27.94 53.29,27.23 53.29,26.11 52.93,25.76 | 52.93,25.76 52.58,25.4 50.95,25.4 48.92,27.43 R8.2 | CN1.3 62.03,5.08 60.81,3.86 59.79,3.86 58.98,4.67 58.98,5.89 v58.27,6.6 | 52.93,25.76 v53.09,25.6 | v53.59,55.88 53.59,46.53 52.78,45.72 51.56,45.72 50.14,44.3 50.14,32 48.97,30.84
  Bottom 0.254: v58.27,6.6 58.27,7.01 53.59,11.68 53.59,15.24 | 53.59,15.24 53.59,25.09 v53.09,25.6 | 53.59,15.24 30.63,15.24 29.82,14.43 29.82,6.6 27.38,4.17 24.74,4.17 16.51,12.39 3.81,12.39 B1.SDA | v53.59,55.88 53.59,59.84 49.84,63.6 36.22,63.6 33.78,66.04 7.67,66.04 J2.2
VBAT  (via drill 0.35)
  Top 0.254: v49.33,57.61 49.33,32.51 49.23,32.41 40.59,32.41 39.37,31.19 39.37,28.75 39.98,28.14 39.98,20.83 IC1.14 | v52.07,60.35 52.07,60.96 U13.+$2 64.67,63.5 66.95,65.79 66.95,86.72 64.77,88.9 U13.+$1
  Bottom 0.254: v52.07,60.35 v49.33,57.61

## Text on the board
tPlace: CO2 Flux Sensor Pad / Casey Air Quality Lab / Fort Lewis College / 27 June 2024 / Rev 4.0 | CO2 Flux Sensor Pad / Casey Air Quality Lab / Fort Lewis College / 27 June 2024 / Rev 4.0 | GND | 12V | 5V | GND | 12V | 5V | GND | SDA / 3V3 | SCL / 3V3 | CR2032 | CO2 Flux DAQ / Casey Air Quality Lab / Fort Lewis College / 27 June 2024 / Rev 4.0 | GND | SDA / 5V | SCL / 5V | Chmb. (B) | ON - OFF | Amb. (A) | 9-12V / IN | A1 | A0 | 5V | GND | SOIL | 12V | GND | SDA / 5V | SCL / 5V | 3V3 | 5V | 12V | FLOW